# Altium PCB bootleg-4 - plate.PcbDoc
Units mm, origin at the board's own origin, x right, y up, seen from the top; angles counter-clockwise.
Board outline 296 x 105.06 mm, 2 copper layers (Component Side, Bottom Layer), stack 1.571 mm thick; 65 components, 99 nets, 150 pads, 0 vias.
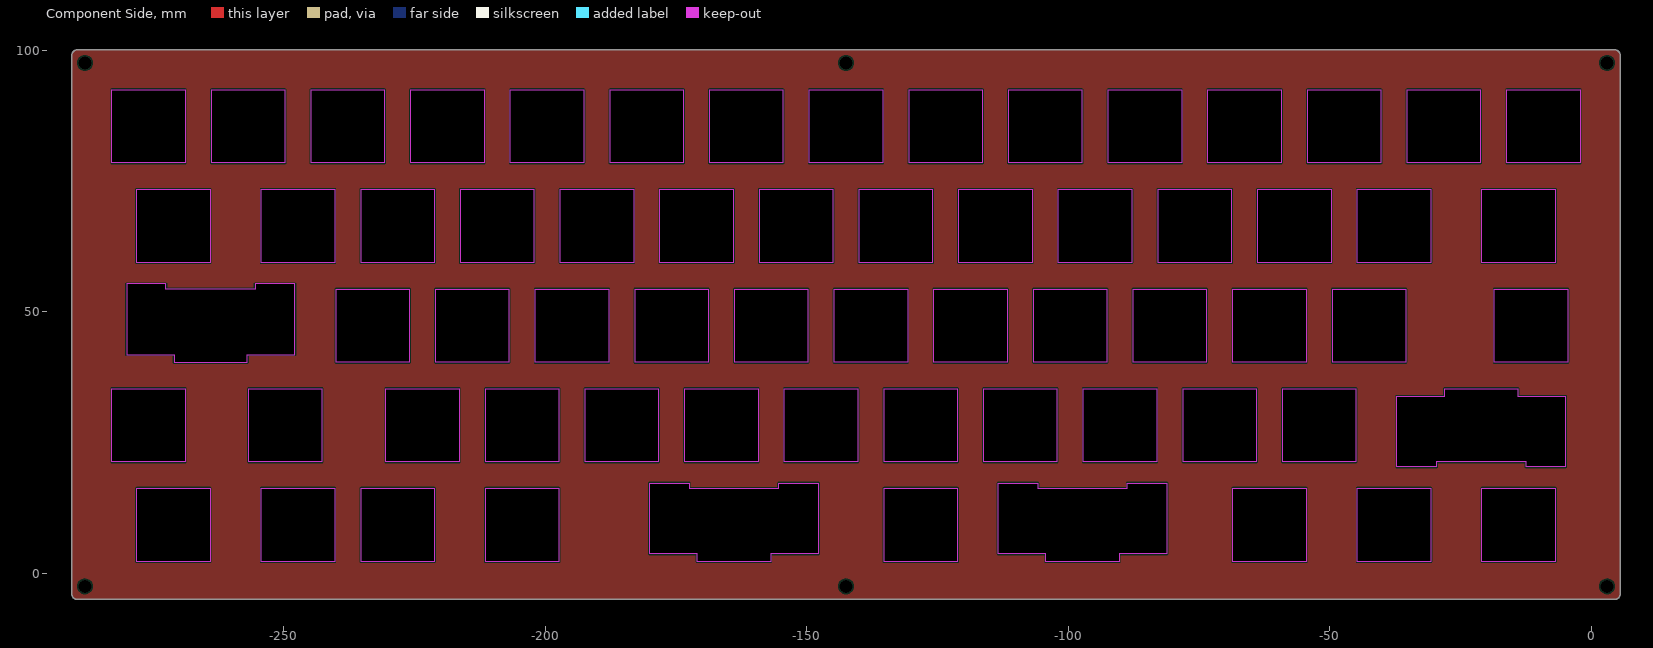
[diagram p0: Component Side view]
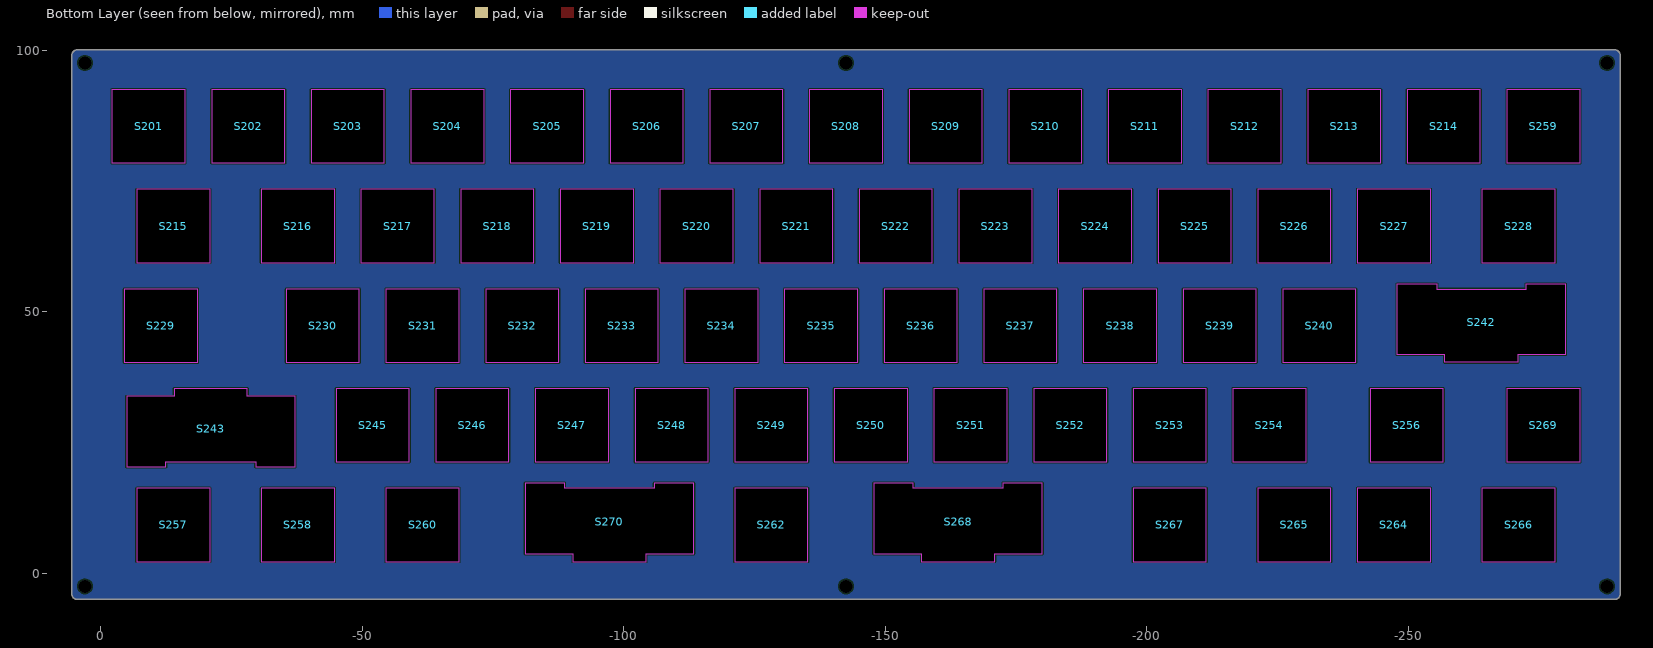
[diagram p1: Bottom Layer view, seen from below]

## Layer stack, top to bottom
Top Solder: solder mask 0.0102, Solder Resist, Dk 3.5
Component Side: signal copper 0.0356
Dielectric 1: core 1.5, FR-4, Dk 4.2
Bottom Layer: signal copper 0.0356
Solder Side: solder mask 0.0102, Solder Resist, Dk 3.5

## Board outline
-290.501,-4.017 -290.501,99.039 cw(c-289.501,99.039) -289.501,100.039 4.499,100.039 cw(c4.499,99.039) 5.499,99.039 5.499,-4.017 cw(c4.499,-4.017) 4.499,-5.017 -289.501,-5.017 cw(c-289.501,-4.017)

## Design rules (kind name [scope] priority, off if disabled: settings)
Clearance [All] p1: gap=0.2 ignorepadtopadclearanceinfootprint=FALSE except(0: Arc-Hole Track-Hole SMDPad-Hole THPad-Hole Via-Hole Fill-Hole Poly-Hole Region-Hole Text-Hole; 0.254: THPad-THPad THPad-Via THPad-Fill THPad-Poly THPad-Region THPad-Text Via-Via Via-Fill Via-Poly Via-Region Via-Text Fill-Fill Fill-Poly Fill-Region Fill-Text Poly-Poly Poly-Region Poly-Text Region-Region Region-Text Text-Text)
ComponentClearance [InComponent('No Component') And OnLayer('Component Side')] p1: gap=0.254 collisioncheckmode=3 verticalgap=0.254 showdistances=FALSE
DiffPairsRouting DiffPairsRouting_USB [InDifferentialPairClass('All Differential Pairs')] p1: maxlimit=0.254 minlimit=0.203 mostfreqgap=0.203 toplayer_minwidth=0.152 toplayer_maxwidth=0.381 toplayer_prefwidth=0.152 bottomlayer_minwidth=0.152 bottomlayer_maxwidth=0.381 bottomlayer_prefwidth=0.152 maxuncoupledlength=12.7
DiffPairsRouting [All] p2: maxlimit=0.254 minlimit=0.254 mostfreqgap=0.254 toplayer_minwidth=0.381 toplayer_maxwidth=0.381 toplayer_prefwidth=0.381 bottomlayer_minwidth=0.381 bottomlayer_maxwidth=0.381 bottomlayer_prefwidth=0.381 maxuncoupledlength=12.7
HoleSize [All] p1: absolutevalues=TRUE maxlimit=20 minlimit=0.025 maxpercent=80.000 minpercent=20.000
MatchedLengths MatchedLengths_USB_DiffPairs_1 [All] p1: tolerance=0.127 checknetsindiffpair=TRUE checkdiffpairvsdiffpair=FALSE checkxsignals=FALSE checkothers=FALSE
MatchedLengths MatchedLengths_USB_DiffPairs [All] p2: tolerance=0.127 checknetsindiffpair=TRUE checkdiffpairvsdiffpair=FALSE checkxsignals=FALSE checkothers=FALSE
PolygonConnect PolygonConnect_1 [All vs IsVia] p1: connectstyle=Direct reliefconductorwidth=0.254 reliefentries=4 polygonreliefangle="90 Angle" airgapwidth=0.254
PolygonConnect [All] p2: connectstyle=Relief reliefconductorwidth=0.254 reliefentries=4 polygonreliefangle="90 Angle" airgapwidth=0.254
RoutingVias [All] p1: holewidth=0.711 width=1.27 viastyle="Through Hole" minholewidth=0.711 minwidth=1.27 maxholewidth=0.711 maxwidth=1.27
SolderMaskExpansion [All] p1: expansion=0.102 istentingtop=FALSE
Width [All] p1: maxlimit=0.254 minlimit=0.203 preferedwidth=0.254
27 further rules are at their usual default settings.

## Classes and differential pairs
component class Designator: C201 C202 C203 C204 C205 C206
differential pair D_PRE: +D_PRE_P -D_PRE_N
differential pair D: +D_P -D_N

## Components (designator, comment, footprint, x,y, rotation, side; value= is the part's Value field where it differs from the comment)
S201 "MX" Plate_MX_1U -9.15,85.415 r180 bottom
S202 "MX" Plate_MX_1U -28.2,85.415 r180 bottom
S203 "MX" Plate_MX_1U -47.25,85.415 r180 bottom
S204 "MX" Plate_MX_1U -66.3,85.415 r180 bottom
S205 "MX" Plate_MX_1U -85.35,85.415 r180 bottom
S206 "MX" Plate_MX_1U -104.4,85.415 r180 bottom
S207 "MX" Plate_MX_1U -123.45,85.415 r180 bottom
S208 "MX" Plate_MX_1U -142.5,85.415 r180 bottom
S209 "MX" Plate_MX_1U -161.55,85.415 r180 bottom
S210 "MX" Plate_MX_1U -180.6,85.415 r180 bottom
S211 "MX" Plate_MX_1U -199.65,85.415 r180 bottom
S212 "MX" Plate_MX_1U -218.7,85.415 r180 bottom
S213 "MX" Plate_MX_1U -237.75,85.415 r180 bottom
S214 "MX" Plate_MX_1U -256.8,85.415 r180 bottom
S215 "MX" PLATE_MX_1.5U -13.912,66.365 r180 bottom
S216 "MX" Plate_MX_1U -37.725,66.365 r180 bottom
S217 "MX" Plate_MX_1U -56.775,66.365 r180 bottom
S218 "MX" Plate_MX_1U -75.825,66.365 r180 bottom
S219 "MX" Plate_MX_1U -94.875,66.365 r180 bottom
S220 "MX" Plate_MX_1U -113.925,66.365 r180 bottom
S221 "MX" Plate_MX_1U -132.975,66.365 r180 bottom
S222 "MX" Plate_MX_1U -152.025,66.365 r180 bottom
S223 "MX" Plate_MX_1U -171.075,66.365 r180 bottom
S224 "MX" Plate_MX_1U -190.125,66.365 r180 bottom
S225 "MX" Plate_MX_1U -209.175,66.365 r180 bottom
S226 "MX" Plate_MX_1U -228.225,66.365 r180 bottom
S227 "MX" Plate_MX_1U -247.275,66.365 r180 bottom
S228 "MX" PLATE_MX_1.5U -271.087,66.365 r180 bottom
S229 "MX" "PLATE_MX - CAPS - stepped" -16.294,47.315 r180 bottom
S230 "MX" Plate_MX_1U -42.487,47.315 r180 bottom
S231 "MX" Plate_MX_1U -61.537,47.315 r180 bottom
S232 "MX" Plate_MX_1U -80.587,47.315 r180 bottom
S233 "MX" Plate_MX_1U -99.637,47.315 r180 bottom
S234 "MX" Plate_MX_1U -118.687,47.315 r180 bottom
S235 "MX" Plate_MX_1U -137.737,47.315 r180 bottom
S236 "MX" Plate_MX_1U -156.787,47.315 r180 bottom
S237 "MX" Plate_MX_1U -175.837,47.315 r180 bottom
S238 "MX" Plate_MX_1U -194.887,47.315 r180 bottom
S239 "MX" Plate_MX_1U -213.937,47.315 r180 bottom
S240 "MX" Plate_MX_1U -232.987,47.315 r180 bottom
S242 "MX" "PLATE_MX - Enter_ANSI" -263.95,47.315 r0 bottom
S243 "MX" "PLATE_MX - Left shift ANSI" -21.056,28.265 r0 bottom
S245 "MX" Plate_MX_1U -52.012,28.265 r180 bottom
S246 "MX" Plate_MX_1U -71.062,28.265 r180 bottom
S247 "MX" Plate_MX_1U -90.112,28.265 r180 bottom
S248 "MX" Plate_MX_1U -109.162,28.265 r180 bottom
S249 "MX" Plate_MX_1U -128.212,28.265 r180 bottom
S250 "MX" Plate_MX_1U -147.262,28.265 r180 bottom
S251 "MX" Plate_MX_1U -166.312,28.265 r180 bottom
S252 "MX" Plate_MX_1U -185.362,28.265 r180 bottom
S253 "MX" Plate_MX_1U -204.412,28.265 r180 bottom
S254 "MX" Plate_MX_1U -223.462,28.265 r180 bottom
S256 "MX" Plate_MX_1U -249.682,28.265 r180 bottom
S257 "MX" PLATE_MX_1.5U -13.912,9.215 r180 bottom
S258 "MX" Plate_MX_1U -37.719,9.215 r180 bottom
S259 "MX" Plate_MX_1U -275.85,85.415 r180 bottom
S260 "MX" PLATE_MX_1.5U -61.537,9.215 r180 bottom
S262 "MX" Plate_MX_1U -128.212,9.215 r180 bottom
S264 "MX" Plate_MX_1U -247.269,9.215 r180 bottom
S265 "MX" Plate_MX_1U -228.225,9.215 r180 bottom
S266 "MX" PLATE_MX_1.5U -271.087,9.215 r180 bottom
S267 "MX" PLATE_MX_1.5U -204.412,9.215 r180 bottom
S268 "MX" "PLATE_MX - Left shift ANSI" -163.931,9.215 r180 bottom
S269 "MX" Plate_MX_1U -275.85,28.265 r180 bottom
S270 "MX" "PLATE_MX - Left shift ANSI" -97.282,9.215 r180 bottom

## Footprints (in the part's own frame and the unit in brackets; to place one, negate y for a bottom-side part, rotate by r counter-clockwise, add the part's x,y. Pads: shape width x height; smd on the part's side, far side on the other; paste and mask are expansions set on the pad)
"PLATE_MX - CAPS - stepped" [mm]
  round 1 on Mech14: ""(-4.763,0) ""(-4.763,0)
  Component Side pour cut-out: -11.763,-7 2.238,-7 2.238,7 -11.763,7
  Keep-Out Layer board cut-out: -11.763,-7 2.238,-7 2.238,7 -11.763,7
"PLATE_MX - Enter_ANSI" [mil]
  round 157.01 on Mech14: ""(-470,-325) ""(470,-325)
  round 120 on Mech14: ""(-470,275) ""(470,275)
  round 39.37 on Mech14: ""(0,0) ""(0,0) ""(0,0)
  Keep-Out Layer board cut-out: -633.86,-313.78 -633.86,217.71 -275.59,217.72 -275.59,275.59 275.59,275.59 275.59,217.71 633.86,217.71 633.86,-313.77 333.68,-313.77 333.69,-275.58 -337.64,-275.58 -337.64,-313.78
"PLATE_MX - Left shift ANSI" [mil]
  round 120 on Mech14: ""(-470,-275) ""(470,-275)
  round 157.01 on Mech14: ""(-470,325) ""(470,325)
  round 39.37 on Mech14: ""(0,0)
  Keep-Out Layer board cut-out: 633.86,313.78 337.64,313.78 337.64,275 -337.64,275 -337.64,313.78 -635,313.78 -635,-217.73 -275.59,-217.73 -275.59,-275.59 275.59,-275.59 275.59,-217.72 633.86,-217.72
PLATE_MX_1.5U [mm]
  round 1 on Mech14: ""(0,0) ""(0,0)
  Component Side pour cut-out: -7,-7 7,-7 7,7 -7,7
  Keep-Out Layer board cut-out: -7,-7 7,-7 7,7 -7,7
Plate_MX_1U [mm]
  round 1 on Mech14: ""(0,0) ""(0,0)
  Component Side pour cut-out: -7,-7 7,-7 7,7 -7,7
  Keep-Out Layer board cut-out: -7,-7 7,-7 7,7 -7,7

## Part data
S201 S202 S203 S204 S205 S206 S207 S208 S209 S210 S211 S212 S213 S214 S216 S217 S218 S219 S220 S221 S222 S223 S224 S225 S226 S227 S228 S229 S230 S231 S232 S233 S234 S235 S236 S237 S238 S239 S240 S242 S243 S245 S246 S247 S248 S249 S250 S251 S252 S253 S254 S256 S257 S258 S259 S260 S262 S264 S265 S266 S267 S268 S269 S270: library part SW-PB, "Switch"
S215: library part SW-PB, "TAB"

## Free pads (board coordinates)
  round 0 hole 2.5 unplated: ""(-288.001,-2.517) ""(-288.001,97.539) ""(-142.501,-2.517) ""(-142.501,97.539) ""(2.999,-2.517) ""(2.999,97.539)

## Nets (pads, with @x,y where several pads share a name; then routed paths per layer and width w, separated by ;. In a path a pad name is that pad's centre, name@x,y a point inside that pad or via, vN(x,y) a via of type N, cw(c..) or ccw(c..) an arc to the next point about the centre after c; other vN are vias at no path point)
col1: 
col2: 
col3: 
col4: 
col5: 
col6: 
col7: 
col8: 
col9: 
col10: 
col11: 
col12: 
col13: 
col14: 
col15: 
D_N: 
D_P: 
D_PRE_N: 
D_PRE_P: 
GND: 
NetC301_2: 
NetC305_2: 
NetC306_2: 
NetCON301_A5: 
NetCON301_B5: 
NetD201_1: 
NetD202_1: 
NetD203_1: 
NetD204_1: 
NetD205_1: 
NetD206_1: 
NetD207_1: 
NetD208_1: 
NetD209_1: 
NetD210_1: 
NetD211_1: 
NetD212_1: 
NetD213_1: 
NetD214_1: 
NetD215_1: 
NetD216_1: 
NetD217_1: 
NetD218_1: 
NetD219_1: 
NetD220_1: 
NetD221_1: 
NetD222_1: 
NetD223_1: 
NetD224_1: 
NetD225_1: 
NetD226_1: 
NetD227_1: 
NetD228_1: 
NetD229_1: 
NetD230_1: 
NetD231_1: 
NetD232_1: 
NetD233_1: 
NetD234_1: 
NetD235_1: 
NetD236_1: 
NetD237_1: 
NetD238_1: 
NetD239_1: 
NetD240_1: 
NetD242_1: 
NetD243_1: 
NetD245_1: 
NetD246_1: 
NetD247_1: 
NetD248_1: 
NetD249_1: 
NetD250_1: 
NetD251_1: 
NetD252_1: 
NetD253_1: 
NetD254_1: 
NetD256_1: 
NetD257_1: 
NetD258_1: 
NetD259_1: 
NetD260_1: 
NetD262_1: 
NetD264_1: 
NetD265_1: 
NetD266_1: 
NetD267_1: 
NetD268_1: 
NetD269_1: 
NetD270_1: 
NetR302_1: 
PC2: 
PC4: 
PD0: 
PD2: 
PD4: 
RAW: 
RST: 
VCC: 
pads on no net: S201. S202. S203. S204. S205. S206. S207. S208. S209. S210. S211. S212. S213. S214. S215. S216. S217. S218. S219. S220. S221. S222. S223. S224. S225. S226. S227. S228. S229. S230. S231. S232. S233. S234. S235. S236. S237. S238. S239. S240. S242. S243. S245. S246. S247. S248. S249. S250. S251. S252. S253. S254. S256. S257. S258. S259. S260. S262. S264. S265. S266. S267. S268. S269. S270.

## Polygon pours and split planes (outlines as drawn)
no net on Component Side (solid, pour order 1): -290.501,-4.017 -290.501,99.039 cw(c-289.501,99.039) -289.501,100.039 4.499,100.039 cw(c4.499,99.039) 5.499,99.039 5.499,-4.017 cw(c4.499,-4.017) 4.499,-5.017 -289.501,-5.017 cw(c-289.501,-4.017)
no net on Bottom Layer (solid, pour order 0): -290.501,-4.017 -290.501,99.039 cw(c-289.501,99.039) -289.501,100.039 4.499,100.039 cw(c4.499,99.039) 5.499,99.039 5.499,-4.017 cw(c4.499,-4.017) 4.499,-5.017 -289.501,-5.017 cw(c-289.501,-4.017)

## Silkscreen, mask and mechanical layers (free items; w line width, h text height)
outline:
  the board outline again, w0.013
Mechanical 3:
  circle w0.006: c-1153.35,-206.327 r0.003
Mechanical 4:
  circle w0.006: c-1153.35,-206.327 r0.003
Mechanical 5:
  circle w0.006: c-1153.35,-206.327 r0.003